# Altium PCB auto-on-relay.PcbDoc
Units mil, origin at the board's own origin, x right, y up, seen from the top; angles counter-clockwise.
Board outline 5120 x 3350 mil, 2 copper layers (Top Layer, Bottom Layer); 68 components, 73 nets, 308 pads, 0 vias.
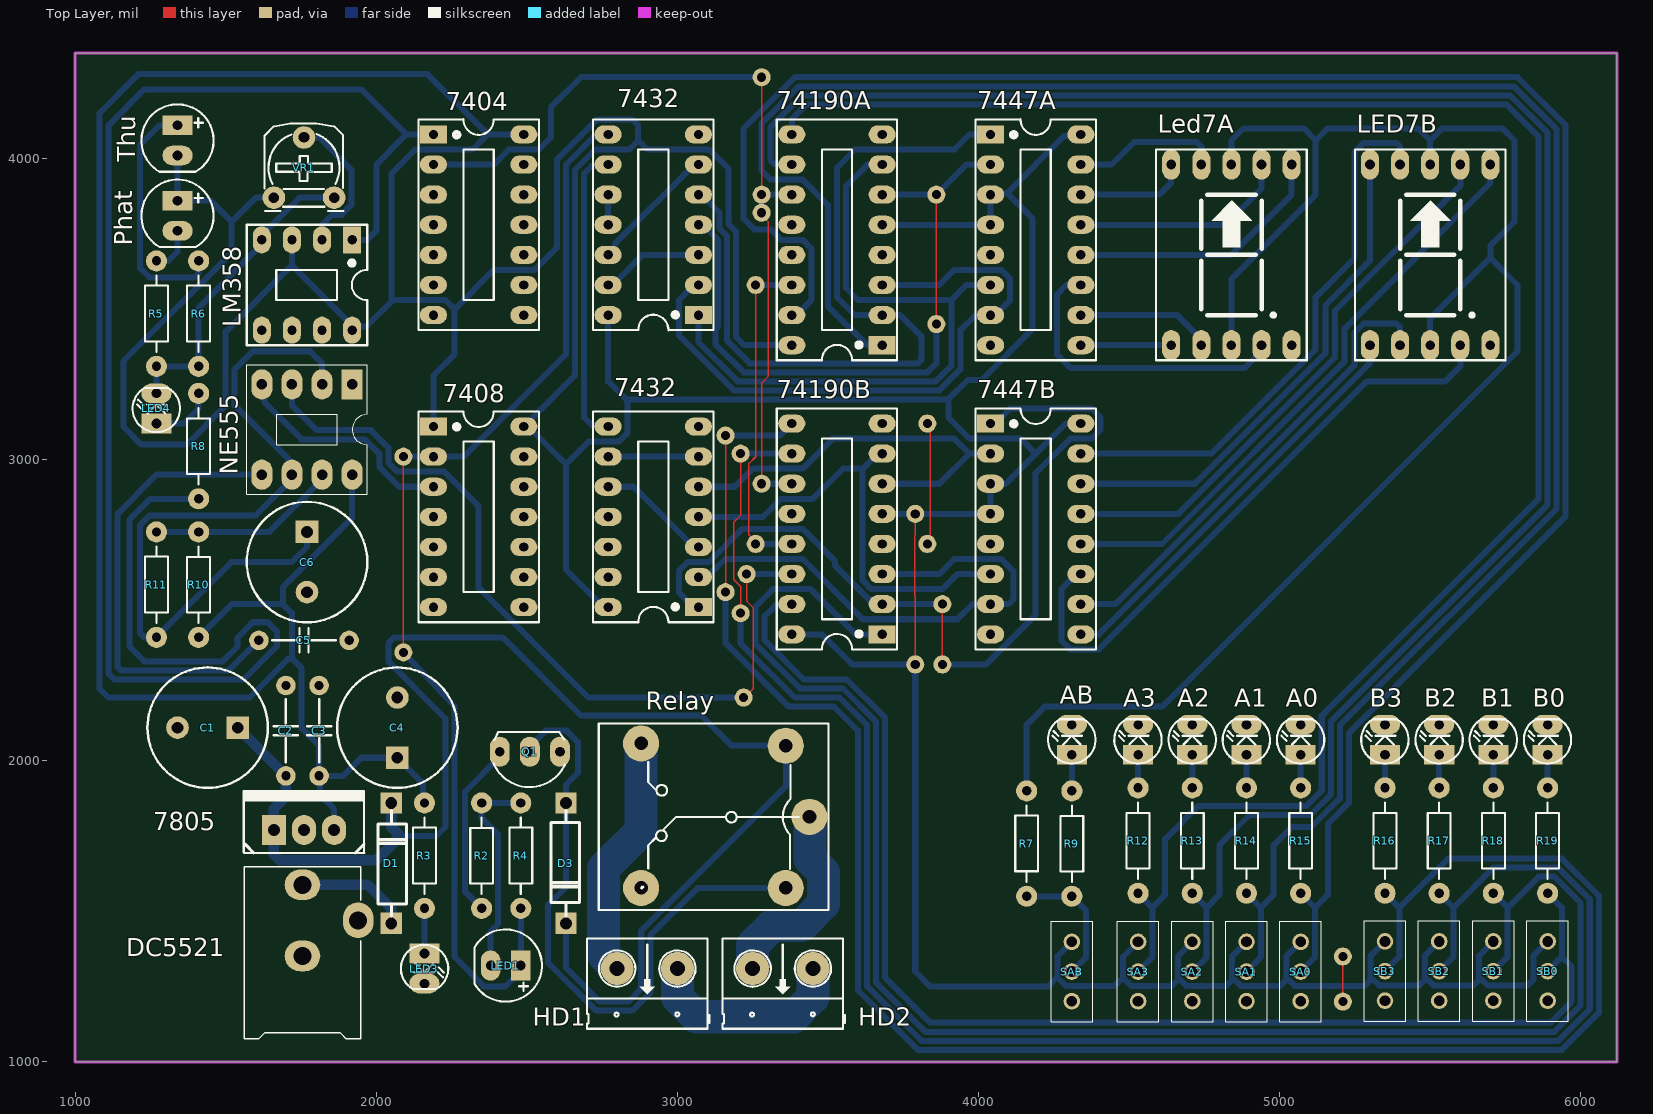
[diagram p0: Top Layer view]
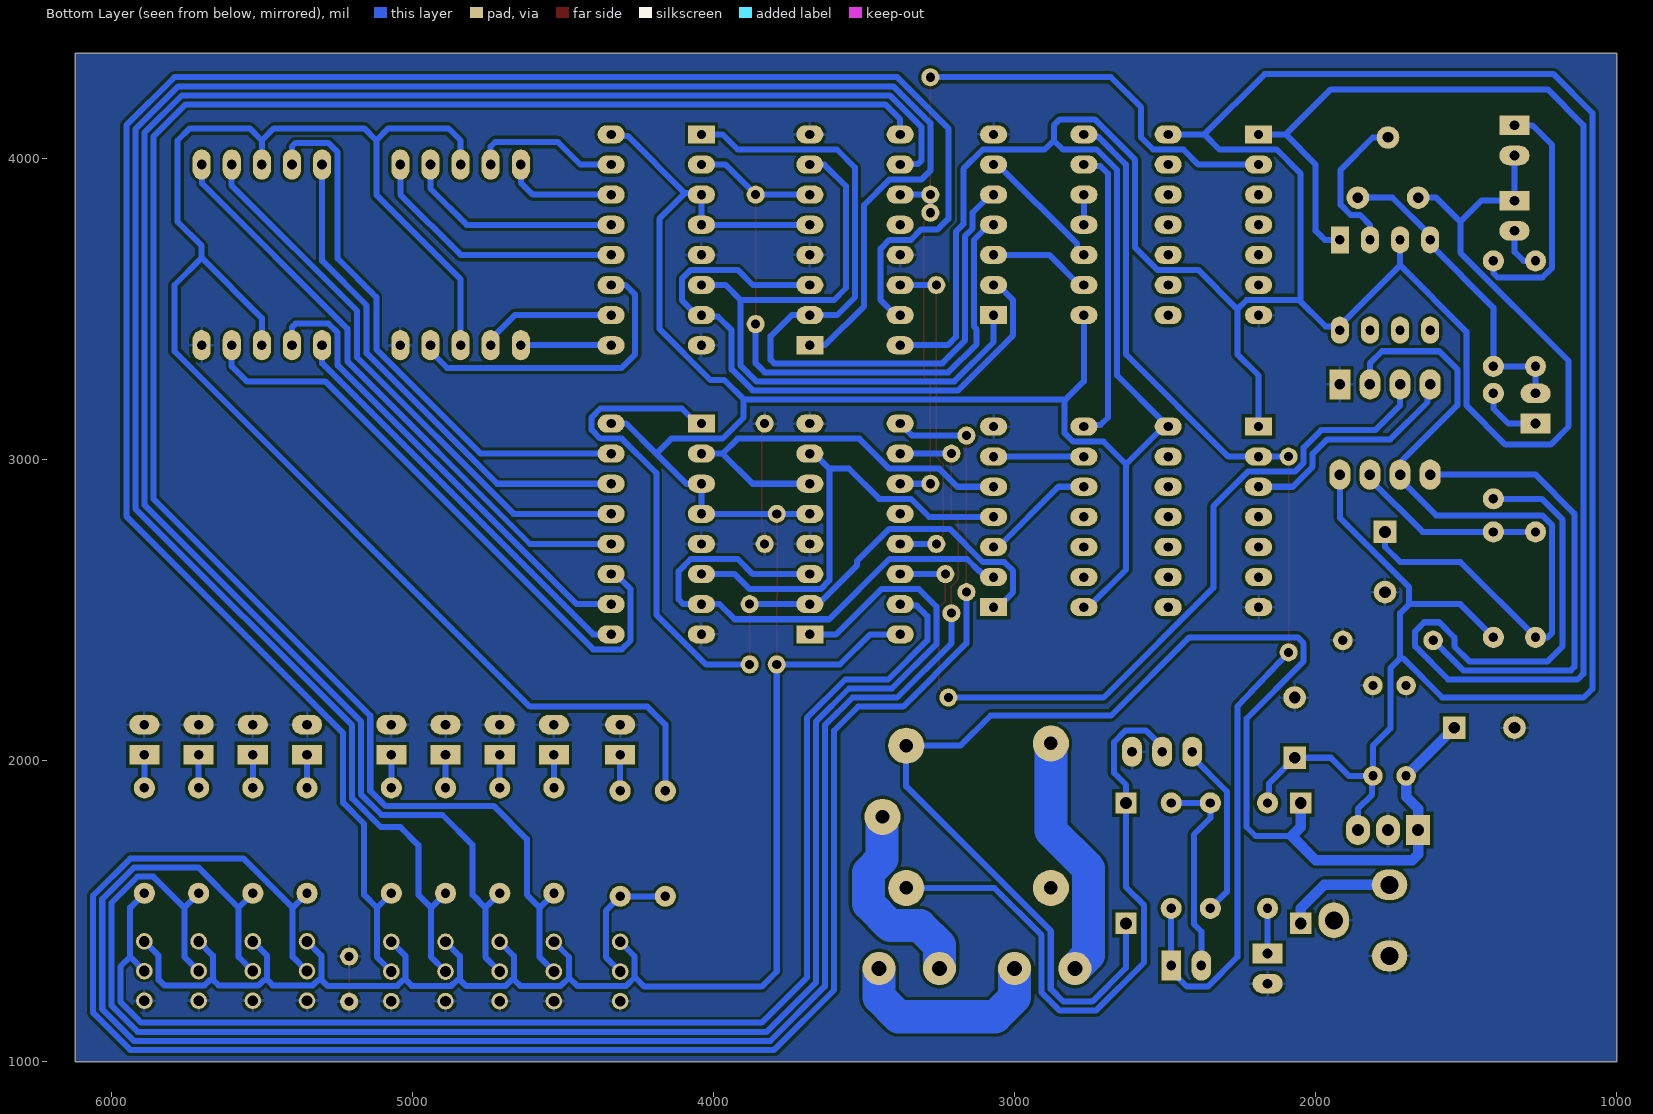
[diagram p1: Bottom Layer view, seen from below]
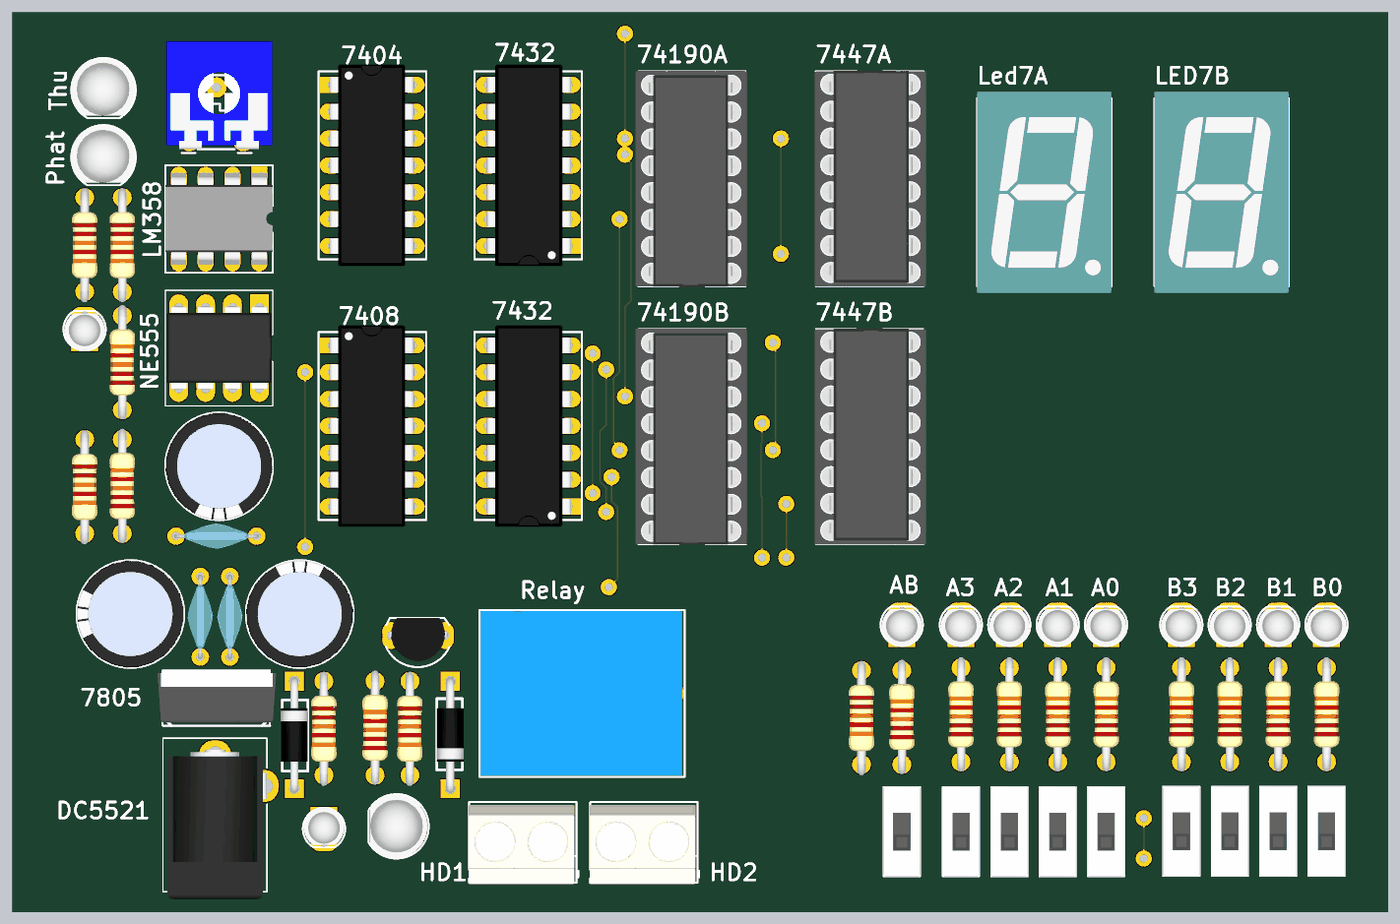
[diagram p2: 3D render of the assembled board from above, using the file's embedded part models]

## Layer stack, top to bottom
Top Solder: solder mask 0.4, Solder Resist, Dk 3.5
Top Layer: signal copper 1.4
Dielectric 1: dielectric 12.6, FR-4, Dk 4.8
Bottom Layer: signal copper 1.4
Bottom Solder: solder mask 0.4, Solder Resist, Dk 3.5

## Board outline
1000,1000 1000,4350 6120,4350 6120,1000

## Design rules (kind name [scope] priority, off if disabled: settings)
Clearance [All] p1: gap=10 ignorepadtopadclearanceinfootprint=FALSE
PolygonConnect [All] p1: connectstyle=Relief reliefconductorwidth=10 reliefentries=4 polygonreliefangle="90 Angle" airgapwidth=10
RoutingVias [All] p1: holewidth=28 width=50 viastyle="Through Hole" minholewidth=28 minwidth=50 maxholewidth=28 maxwidth=50
SilkToSilkClearance [All] p1: silktosilkclearance=5
SilkToSolderMaskClearance [IsText] p1: minsilkscreentomaskgap=10 clearancetoexposedcopper=TRUE
SolderMaskExpansion [All] p1: expansion=4 istentingtop=FALSE
Width [All] p1: maxlimit=150 minlimit=1 preferedwidth=35
28 further rules are at their usual default settings.

## Components (designator, comment, footprint, x,y, rotation, side; value= is the part's Value field where it differs from the comment)
7404 "7404" DIP14/W0.3 2190,4080 r270 top
7408 "7408" DIP14/W0.3 2190,3110 r270 top (schematic designator IC7)
7432 "7432" DIP14/W0.3 3070,2510 r90 top (schematic designator IC5)
7432 "7432" DIP14/W0.3 3070,3480 r90 top (schematic designator IC4)
7447A "7447" DIP16/W0.3 4040,4080 r270 top value="7447 , 74247"
7447B "7447" DIP16/W0.3 4040,3120 r270 top value="7447 , 74247"
7805 "LM7805" QTO-220 1660,1770 r0 top
74190A "74190" DIP16/W0.3 3680,3380 r90 top
74190B "74190" DIP16/W0.3 3680,2420 r90 top
A0 "LED" LED-3 5070,2020 r90 top value="LED 3 ly Single Colour"
A1 "LED" LED-3 4890,2020 r90 top value="LED 3 ly Single Colour"
A2 "LED" LED-3 4710,2020 r90 top value="LED 3 ly Single Colour"
A3 "LED" LED-3 4530,2020 r90 top value="LED 3 ly Single Colour"
AB "LED" LED-3 4310,2020 r90 top value="LED 3 ly Single Colour" (schematic designator LED5)
B0 "LED" LED-3 5890,2020 r90 top value="LED 3 ly Single Colour"
B1 "LED" LED-3 5710,2020 r90 top value="LED 3 ly Single Colour"
B2 "LED" LED-3 5530,2020 r90 top value="LED 3 ly Single Colour"
B3 "LED" LED-3 5350,2020 r90 top value="LED 3 ly Single Colour"
C1 "1000uF" CYL/D.400/LS.200 1440,2110 r180 top
C2 "104" "CAP Ceramic/W300" 1700,1950 r90 top
C3 "104" "CAP Ceramic/W300" 1810,1950 r90 top
C4 "1000uF" CYL/D.400/LS.200 2070,2110 r90 top
C5 "10nF" "CAP Ceramic/W300" 1610,2400 r0 top
C6 "47uF" CYL/D.400/LS.200 1770,2660 r270 top
D1 "Diode Power" DIODE/POW/1A 2050,1460 r90 top
D3 "Diode Power" DIODE/POW/1A 2630,1860 r270 top
DC5521 "CONN_PWR_JACK_2.1x5.5mm" CONN_PWR_JACK_2.1x5.5mm 1754.96,1048.74 r180 top value="2.1mm ID, 5.5mm OD"
HD1 "Header 2" HED2 3000,1310 r180 top
HD2 "Header 2" HED2 3450,1310 r180 top
LED1 "LED" LED-5-RED 2480,1320 r180 top value="LED 3 ly Single Colour"
LED3 "LED" LED-3 2160,1360 r270 top value="LED 3 ly Single Colour"
LED4 "LED" LED-3 1270,3120 r90 top value="LED 3 ly Single Colour"
Led7A "7SEG S" 7SEGS 4640,3380 r0 top value="LED 7S SEG"
LED7B "7SEG S" 7SEGS 5300,3380 r0 top value="LED 7S SEG"
LM358 "LM358" DIP8/W0.3 1920,3730 r180 top
NE555 "TLC555" "DIP 8" 1920,3250 r180 top
Phat "Photo Diode" LED-5-GREEN 1340,3860 r270 top
Q1 "C1815" QTO-92 2510,2030 r180 top
R2 "10k" R1/4W 2350,1860 r270 top
R3 "150" R1/4W 2160,1510 r90 top
R4 "10k" R1/4W 2480,1510 r90 top
R5 "150" R1/4W 1270,3310 r90 top
R6 "10k" R1/4W 1410,3310 r90 top
R7 "75" R1/4W 4160,1550 r90 top
R8 "180" R1/4W 1410,3220 r270 top
R9 "150" R1/4W 4310,1900 r270 top
R10 "10k" R1/4W 1410,2760 r270 top
R11 "10k" R1/4W 1270,2410 r90 top
R12 "150" R1/4W 4530,1910 r270 top
R13 "150" R1/4W 4710,1910 r270 top
R14 "150" R1/4W 4890,1910 r270 top
R15 "150" R1/4W 5070,1910 r270 top
R16 "150" R1/4W 5350,1910 r270 top
R17 "150" R1/4W 5530,1910 r270 top
R18 "150" R1/4W 5710,1910 r270 top
R19 "150" R1/4W 5890,1910 r270 top
Relay "Relay 10A/12V" RL_SPDT_10A 3438.74,1813.78 r180 top value="Relay SPDT, 10A, 12V"
SA0 "SS12D00G3" SS12D00G3 5070,1300 r90 top
SA1 "SS12D00G3" SS12D00G3 4890,1300 r90 top
SA2 "SS12D00G3" SS12D00G3 4710,1300 r90 top
SA3 "SS12D00G3" SS12D00G3 4530,1300 r90 top
SAB "SS12D00G3" SS12D00G3 4310,1300 r90 top
SB0 "SS12D00G3" SS12D00G3 5890,1301.57 r90 top
SB1 "SS12D00G3" SS12D00G3 5710,1301.57 r90 top
SB2 "SS12D00G3" SS12D00G3 5530,1301.57 r90 top
SB3 "SS12D00G3" SS12D00G3 5350,1301.57 r90 top
Thu "Photo Diode" LED-5-GREEN 1340,4110 r270 top
VR1 "10K" VR 1660,3870 r0 top

## Footprints (in the part's own frame and the unit in brackets; to place one, negate y for a bottom-side part, rotate by r counter-clockwise, add the part's x,y. Pads: shape width x height; smd on the part's side, far side on the other; paste and mask are expansions set on the pad)
7SEGS [mil] "DIP 10 Leads; Body 12 x 15 mm; Pitch 0.5 mm"
  oval 60x100 hole 32: 1(0,0) 2(100,0) 3(200,0) 4(300,0) 5(400,0) 6(400,600) 7(300,600) 8(200,600) 9(100,600) 10(0,600)
  silkscreen extent -50,-50 450,650, body extent -50,-75 450,675, height 316
"CAP Ceramic/W300" [mil]
  round 65 hole 31: 1(0,0) 2(300,0)
  silkscreen extent 45,-40 255,40, body extent -8,-47 307,47, height 340
CONN_PWR_JACK_2.1x5.5mm [mm] "Power Connector, 2.1mm ID, 5.5mm OD"
  oval 3x2.6 hole 1.511: 1(0,-13.7) 2(0,-7.7)
  oval 2.6x3 hole 1.511: 3(-4.7,-10.7)
  silkscreen extent -4.9,-15.22 4.92,-0.7, body extent -4.9,-14.1 4.5,0, height 11
CYL/D.400/LS.200 [mil]
  rect 75x75 hole 39: 1(-100,0)
  round 75 hole 39: 2(100,0)
  silkscreen extent -200,-200 200,200, body extent -198,-199 200,199, height 500
DIODE/POW/1A [mm]
  rect 1.8x1.8 hole 1: 1(0,0) 2(10.16,0)
  silkscreen extent 0.64,-1.27 9.53,1.14, body extent -0.38,-1.28 10.54,1.28, height 2.55
DIP8/W0.3 [mil] "8 PIN, W 300mil, Pin to pin 100mil"
  rect 60x90 hole 31: 1(0,0)
  oval 60x90 hole 31: 2(100,0) 3(200,0) 4(300,0) 5(300,300) 6(200,300) 7(100,300) 8(0,300)
  silkscreen extent -50,-50 350,350, body extent -50,-40 350,336, height 201
DIP14/W0.3 [mil] "14PIN, W 300mil, Pin to pin 100mil"
  rect 60x90 hole 31: 1(0,0)
  oval 60x90 hole 31: 2(100,0) 3(200,0) 4(300,0) 5(400,0) 6(500,0) 7(600,0) 8(600,300) 9(500,300) 10(400,300) 11(300,300) 12(200,300) 13(100,300) 14(0,300)
  silkscreen extent -50,-50 650,350, body extent -75,-10 675,305, height 159
DIP16/W0.3 [mil] "16 PIN, W 300mil, Pin to pin 100mil"
  rect 60x90 hole 31: 1(0,0)
  oval 60x90 hole 31: 2(100,0) 3(200,0) 4(300,0) 5(400,0) 6(500,0) 7(600,0) 8(700,0) 9(700,300) 10(600,300) 11(500,300) 12(400,300) 13(300,300) 14(200,300) 15(100,300) 16(0,300)
  silkscreen extent -50,-50 750,350, body extent -52,-53 752,360, height 317
"DIP 8" [mil]
  rect 70x100 hole 35: 1(0,0)
  oval 70x100 hole 35: 2(100,0) 3(200,0) 4(300,0) 5(300,300) 6(200,300) 7(100,300) 8(0,300)
  silkscreen extent -50,-65 350,365, body extent -45,-4 345,304, height 190
HED2 [mil] "Header 2, 2 pin, hight 300mil, Pin to Pin 200, Colour Green"
  round 110 hole 50: 1(0,0) 2(200,0)
  silkscreen extent -106,-100 300,200, body extent -92,-90 302,205, height 394
LED-3 [mil] "LED 2 PIN, 3ly Only colour"
  rect 65x100 hole 32: 1(0,0)
  oval 65x100 hole 32: 2(100,0)
  silkscreen extent -29,-78 118,79, body extent -29,-75 109,75, height 256
LED-5-GREEN [mil] "LED 2 PIN, 5 ly , Only colour,pin to pin 100mil"
  rect 65x100 hole 32: 1(0,0)
  oval 65x100 hole 32: 2(100,0)
  silkscreen extent -70,-120 154,120, body extent -69,-120 145,117, height 339
LED-5-RED [mil] "LED 2 PIN, 5 ly , Only colour,pin to pin 100mil"
  rect 65x100 hole 32: 1(0,0)
  oval 65x100 hole 32: 2(100,0)
  silkscreen extent -70,-120 154,120, body extent -65,-119 149,118, height 339
QTO-92 [mil] "TO-92"
  oval 66x100 hole 32: 1(-100,0) 2(0,0) 3(100,0)
  silkscreen extent -117,-65 120,118, body extent -109,-66 109,95, height 245
QTO-220 [mil] "TO-220 - 1-2-3"
  rect 80x100 hole 39: 1(0,0)
  oval 80x100 hole 39: 2(100,0) 3(200,0)
  silkscreen extent -100,-76 300,130, body extent -119,-64 322,121, height 905
R1/4W [mil] "R 1/4W, 2 Pin, 350mil"
  round 70 hole 31: 1(0,0) 2(350,0)
  silkscreen extent 48,-38 302,38, body extent -40,-47 386,47, height 111
RL_SPDT_10A [mil] "Relay SPDT, 5 pin, 10A,W 650mil, L 800mil, H 800mil"
  round 120 hole 45: 1(0,0) 2(559.06,236.22) 3(559.06,-243.78) 4(78.74,-236.22) 5(78.74,236.22)
  silkscreen extent -63,-311 700,310, body extent -55,-306 697,304, height 602
SS12D00G3 [mm]
  round 1.4 hole 0.9: 1(-2.5,0) 2(0,0) 3(2.5,0)
  silkscreen extent -4.25,-1.75 4.25,1.75, body extent -4.25,-1.75 4.25,1.75, height 6.7
VR [mil] "Resistor Variable"
  round 75 hole 35: 1(0,0) 2(100,200) 3(200,0)
  silkscreen extent -31,-44 231,246, body extent -87,-30 307,372, height 165

## Part data
7404: "Hex Inverter", Code_IPC=SOIC127P600-14, ComponentLink1Description="Manufacturer Link", ComponentLink1URL=http://www.national.com/, ComponentLink2Description=Datasheet, ComponentLink2URL=http://www.fairchildsemi.com/ds/74/74F04.pdf
7408: "Quad 2-Input AND Gate"
7432 7432: "Quad 2-Input OR Gate"
7447A 7447B: "BCD to 7-Segment Decoder/Driver"
7805: library part LM78xx, "On ap +, from + 5 to + 24VDC"
74190A 74190B: "Synchronous 4-Bit Up/Down Counter with Mode Control", Copyright by=VanDungEvn@Gmail.com
A0 A1 A2 A3 AB B0 B1 B2 B3 LED1 LED3 LED4: "LED Single colour Green and Red"
C1 C4 C6: library part Capacitor, "Capacitor pol"
C2 C3 C5: library part "Capacitor NP", "Capacitor non-pol"
D1 D3: PackageDocument=Aug-1999, ComponentLink1Description="Manufacturer Link", ComponentLink1URL=http://www.fairchildsemi.com/, ComponentLink2Description=Datasheet, ComponentLink2URL=http://www.fairchildsemi.com/ds/1N%2F1N5400.pdf, DatasheetDocument=1998, LatestRevisionDate=17-Jul-2002, LatestRevisionNote="Re-released for DXP Platform.", PackageReference=DO-201AD, Published=8-Jun-2000, Publisher="Altium Limited"
DC5521: "Power Connector, THT, 2.1mm ID, 5.5mm OD", Manufacturer 1="CUI Inc", Manufacturer Part Number 1=PJ-102AH, Package / Case="PCB mount", Supplier Part Number 1=CP-102AH-ND, Category=Connectors, Mounting Type="Through Hole", SCDType=undef, Supplier 1=Digi-Key
HD1 HD2: "Header 2 (Green)"
Led7A LED7B: library part "LED 7S", "Single 7 Seg Dipslay"
LM358: "Low-Power Dual Operational Amplifier"
NE555: "TLC555 LinCMOS™ Timer"
Phat Thu: "Photosensitive Diode"
Q1: "NPN 600mW, ECB"
R2 R3 R4 R5 R6 R7 R8 R9 R10 R11 R12 R13 R14 R15 R16 R17 R18 R19: library part Res, "Res"
Relay: library part "Relay 1", "Relay SPDT,10A - 12VDC 5 Pin"
SA0 SA1 SA2 SA3 SAB SB0 SB1 SB2 SB3: "Switch", Manufacturer_Name=Vimex, Datasheet Link=http://vimex.com/switches/techdocs/SS12D00-tech.pdf, Height=7mm, Manufacturer_Part_Number=SS12D00G3
VR1: library part VR, "Var Resistor RM065", RM065-103=1K, RM065-104=10K, RM065-503=5K

## Free pads (board coordinates)
  round 60 hole 30: 3(3860,3880) 4(3860,3450.38) 5(3160,2560) 6(3210,2490) 7(3230,2620) 8(3160,3080) 9(3210,3020) 10(3280,2920) 11(3260,3580) 12(3260,2720) 13(3280,3880) 14(3880,2520) 15(3880,2320) 17(3220,2210) 18(2090,3010) 19(2090,2360) 20(3280,3820) 21(3280,4270) 23(3790,2820) 32(3830,3120) 33(3830,2720) 35(3790,2320) 37(5210,1350) 38(5210,1200)

## Nets (pads, with @x,y where several pads share a name; then routed paths per layer and width w, separated by ;. In a path a pad name is that pad's centre, name@x,y a point inside that pad or via, vN(x,y) a via of type N, cw(c..) or ccw(c..) an arc to the next point about the centre after c; other vN are vias at no path point)
5V: 7404.14 7408.1 7408.14 7432.14 7447A.3 7447A.4 7447A.16 7447B.3 7447B.4 7447B.16 7805.3 74190A.5 74190A.16 74190B.5 74190B.16 C3.1 C4.1 LM358.3 LM358.8 NE555.8 pad.23 pad.35 Phat.1 R3.2 R10.2 SA0.3 SA1.3 SA2.3 SA3.3 SAB.3 SB0.3 SB1.3 SB2.3 SB3.3 Thu.2 VR1.1 | length 24904.2
  Top Layer w5: pad.35 3790,2545.08 3787.5,2547.58 3787.5,2747.24 3790,2749.74 pad.23
  Bottom Layer w20: Thu.2 Phat.1 1450,3860 1520,3790 ; R10.2 1520,2520 1690,2520 ; VR1.1 1600,3870 1520,3790 ; LM358.3 1720,3645 ; 7805.3 1860,1840 1812.5,1887.5 1812.5,1947.5 C3.1 ; NE555.8 1920,2806.72 1690,2576.72 1690,2520 ; R3.2 2155,1865 2155,1925 C4.1 1950,2010 1890,1950 C3.1 ; 7408.1 2190,3280 2260,3350 2260,3500 ; 7404.14 2370,4080 ; 7408.14@2499.59,3115.41 2512.65,3128.48 2512.65,3132.65 2660,3280 2660,3962.43 2727.57,4030 2840,4030 2870,4060 ; 7408.14@2505,3110 2630,2985 ; 7432.14@2770,2510 2755,2510 2630,2635 2630,2985 ; 7432.14@2770,3480 2770,3260 2830,3200 ; 74190B.16 3480,2420 3580,2320 pad.35 3790,1300 3840,1250 4230,1250 4260.3,1280.3 4262.44,1280.3 ; 74190A.16 3222.43,3380 3195,3407.43 3195,3757.43 3170,3782.43 3170,3965.71 3105.71,4030 2900,4030 2870,4060 ; 74190B.5 pad.23 7447B.4 7447B.3 4090,2920 4190,3020 ; 74190A.5 7447A.4 7447A.3 4044.93,3884.93 4094.93,3884.93 ; SAB.3 4262.44,1350.87 4262.44,1280.3 ; 7447B.16 4290,3120 4190,3020 ; 7447A.16 4335.07,4075.07 4285.07,4075.07 4094.93,3884.93 ; SA3.3 4480,1348.43 4480,1280 ; SA2.3 4662.44,1350.87 4662.44,1272.44 ; SA1.3 4842.44,1350.87 4842.44,1272.44 ; SA0.3 5022.44,1350.87 5022.44,1272.44 ; SB3.3 5302.44,1352.44 5302.44,1272.44 ; SB2.3 5482.44,1352.44 5482.44,1272.44 ; SB1.3 5662.44,1352.44 5662.44,1272.44 ; SB0.3 5842.44,1352.44 5842.44,1272.44 5824.02,1254.02 5690.3,1254.02 5671.88,1272.44 5662.44,1272.44 ; 1520,3790 1520,3687.57 1160,3327.57 1160,3110 1220,3050 1370,3050 1500,3180 1500,3425 1720,3645 ; 1690,2520 1720,2490 1720,2340 ; 1720,2340 1710,2340 1580,2210 1110,2210 1081,2239 1081,4151 1210,4280 2170,4280 2370,4080 ; 1720,2340 1752.5,2307.5 1752.5,2107.5 1810,2050 C3.1 ; 1720,3645 1920,3445 LM358.8 1932.43,3442.43 1967.43,3442.43 2055,3530 ; 2055,3530 2230,3530 2260,3500 ; 2055,3530 2050,3535 2050,3950 2130,4030 2320,4030 2370,4080 ; 2260,3500 2390,3630 2525.71,3630 2600,3704.29 2600,3995.71 2734.29,4130 2850,4130 2870,4110 2870,4060 ; 2630,2985 2705,3060 2805.71,3060 2835,3089.29 2835,3195 2830,3200 ; 2830,3200 3900,3200 ; 3900,3200 3900,3140 3970,3070 4140,3070 4190,3020 ; 3900,3200 3964.64,3264.64 4010.36,3264.64 4180,3434.29 4180,3799.85 4094.93,3884.93 ; 4262.44,1280.3 4290.3,1252.44 4452.44,1252.44 4480,1280 ; 4480,1280 4507.56,1252.44 4642.44,1252.44 4662.44,1272.44 ; 4662.44,1272.44 4670.3,1272.44 4690.3,1252.44 4822.44,1252.44 4842.44,1272.44 ; 4842.44,1272.44 4850.3,1272.44 4870.3,1252.44 5002.44,1252.44 5022.44,1272.44 ; 5022.44,1272.44 5030.3,1272.44 5050.3,1252.44 5282.44,1252.44 5302.44,1272.44 ; 5302.44,1272.44 5311.88,1272.44 5330.3,1254.02 5464.02,1254.02 5482.44,1272.44 ; 5482.44,1272.44 5491.88,1272.44 5510.3,1254.02 5644.02,1254.02 5662.44,1272.44
12V-2A: 7805.1 C1.1 C2.1 D1.2 D3.2 Relay.4 | length 4883.3
  Bottom Layer w20: 2080,1750 2200,1750 2230,1780 2230,2140 2040,2330 2040,2390 2060,2410 2420,2410 2680,2150 3080,2150 3180,2050 Relay.4 3360,1915 2880,1435 2880,1242.43 2837.57,1200 2742.43,1200 2630,1312.43 D3.2
  Bottom Layer w35: C1.1 C2.1 1700,1880 1660,1840 7805.1 1660,1690 1680,1670 2000,1670 2080,1750 2050,1780 D1.2
GND: 7404.7 7408.7 7432.7 7447A.5 7447A.8 7447B.5 7447B.8 7805.2 74190A.4 74190A.8 74190A.13 74190B.4 74190B.8 A0.2 A1.2 A2.2 A3.2 AB.2 B0.2 B1.2 B2.2 B3.2 C1.2 C2.2 C3.2 C4.2 C5.2 C6.2 DC5521.2 DC5521.3 LED3.2 Led7A.5 LED7B.5 NE555.1 pad.32 pad.33 pad.37 pad.38 Q1.1 SA0.1 SA1.1 SA2.1 SA3.1 SAB.1 SB0.1 SB1.1 SB2.1 SB3.1 | length 558.3
  Top Layer w5: pad.33 3840,2730 3840,3110 pad.32 ; pad.38 pad.37
IC4_8: 7408.2 7432.8@2770,4080 LED1.1 pad.18 pad.19 R4.1 | length 3711.5
  Top Layer w5: pad.19 pad.18
  Bottom Layer w20: pad.19 2260,2180 2260,1348.25 2358.25,1250 2427.5,1250 2480,1302.5 LED1.1 R4.1 ; pad.18 7408.2 2290,3010 2630,3350 2630,3980 2722.35,4072.35 2762.35,4072.35 7432.8@2770,4080
NE555_3: 74190B.14 NE555.3 pad.7 pad.17 | length 2743.9
  Top Layer w5: pad.17 3230,2218.03 3252.5,2240.53 3252.5,2507.6 3230,2530.1 pad.7
  Bottom Layer w20: NE555.3 1720,3180 1802.28,3097.72 1982.28,3097.72 2040,3040 2040,2989.29 2069.29,2960 2225.71,2960 2340,2845.71 2340,2574.29 2704.29,2210 pad.17 ; pad.7 74190B.14
Net7404_1: 7404.1 LM358.1 R8.2 | length 5402.3
  Bottom Layer w20: R8.2 1250,2870 1180,2800 1180,2380 1230,2330 1490,2330 1539.14,2379.14 1539.14,2409.14 1590,2460 1640,2460 1670,2430 1670,2380 1560,2270 1130,2270 1111,2289 1111,4111 1230,4230 1950,4230 2100,4080 ; LM358.1 1970,3730 2000,3760 2000,3980 2100,4080 ; 7404.1 2100,4080
Net7447A_1: 7432.5@3070,3880 7447A.1 74190A.2 | length 2608.8
  Bottom Layer w20: 7432.5@3070,3880 3080,3880 3140,3820 3140,3767.43 3165,3742.43 3165,3395 3240,3320 3798.28,3320 3810,3331.72 3810,3410 3740,3480 74190A.2 3590,3480 3530,3540 3530,3970 3590,4030 3920,4030 3970,4080 7447A.1
Net7447A_2: 7432.4@3070,3780 7447A.2 74190A.6 pad.3 pad.4 | length 2182.1
  Top Layer w5: pad.4 pad.3
  Bottom Layer w20: 7432.4@3070,3780 3085,3780 3135,3730 3135,3441.72 3126.14,3432.86 3126.14,3383.86 3220,3290 3830,3290 3860,3320 pad.4 ; 74190A.6 pad.3 3960,3980 7447A.2
Net7447A_6: 7432.1@3070,3480 7447A.6 74190A.7 | length 2228.4
  Bottom Layer w20: 7432.1@3070,3480 3070,3390 3200,3260 3857.57,3260 3910,3312.43 3910,3530 ; 74190A.7 3631.72,3980 3560,3908.28 3560,3570 3600,3530 3910,3530 ; 7447A.6 3960,3580 3910,3530
Net7447A_7: 7432.2@3070,3580 7447A.7 74190A.3 | length 2107.7
  Bottom Layer w20: 7432.2@3070,3580 3055,3580 3005,3530 3005,3412.57 3187.57,3230 3870,3230 3940,3300 3940,3430 3985.07,3475.07 4035.07,3475.07 7447A.7 4055,3480 4105,3530 4105,3600.71 4075.71,3630 3919.59,3630 3869.59,3580 74190A.3
Net7447A_9: 7447A.9 Led7A.1 | length 300
  Bottom Layer w20: 7447A.9 Led7A.1
Net7447A_10: 7447A.10 Led7A.2 | length 453.1
  Bottom Layer w20: 7447A.10 4660,3480 4740,3400 Led7A.2
Net7447A_11: 7447A.11 Led7A.4 | length 1032.8
  Bottom Layer w20: 7447A.11 4291.72,3580 4260,3548.28 4260,3350 4305,3305 4885,3305 4940,3360 Led7A.4
Net7447A_12: 7447A.12 Led7A.6 | length 882.8
  Bottom Layer w20: 7447A.12 4840,3680 5040,3880 Led7A.6
Net7447A_13: 7447A.13 Led7A.7 | length 729.7
  Bottom Layer w20: 7447A.13 4820,3780 4940,3900 Led7A.7
Net7447A_14: 7447A.14 Led7A.10 | length 376.6
  Bottom Layer w20: 7447A.14 4600,3880 4640,3920 Led7A.10
Net7447A_15: 7447A.15 Led7A.9 | length 497.3
  Bottom Layer w20: 7447A.15 4441.74,3980 4516.74,4055 4725,4055 4740,4040 Led7A.9
Net7447B_1: 7432.1@3070,2510 7447B.1 74190B.2 pad.14 pad.15 | length 2964
  Top Layer w5: pad.15 pad.14
  Bottom Layer w20: 7432.1@3070,2510 3055,2510 3005,2560 3005,2630.71 3034.29,2660 3105.71,2660 3215.71,2770 3415.71,2770 3523.79,2661.92 3523.79,2648.08 3644.21,2527.65 3672.35,2527.65 74190B.2 pad.14 ; pad.15 4025.71,2320 4190,2484.29 4190,2955.71 4304.29,3070 4375.71,3070 4405,3099.29 4405,3140.71 4375.71,3170 4105,3170 4055,3120 7447B.1
Net7447B_2: 7432.5@3070,2910 7447B.2 74190B.6 | length 1388.4
  Bottom Layer w20: 7432.5@3070,2910 3190,2910 3250,2970 3415.71,2970 3515.71,3070 3920,3070 3970,3020 ; 74190B.6 3870,2920 3970,3020 ; 7447B.2 3970,3020
Net7447B_6: 7432.4@3070,2810 7447B.6 74190B.7 | length 1525.5
  Bottom Layer w20: 7432.4@3070,2810 3284.29,2810 3344.29,2870 3450,2870 3550,2970 3615,2970 ; 74190B.7 3665,3020 3615,2970 ; 7447B.6 3930,2620 3880,2570 3644.29,2570 3615,2599.29 3615,2970
Net7447B_7: 7432.2@3070,2610 7447B.7 74190B.3 | length 1747.9
  Bottom Layer w20: 7432.2@3070,2610 3095.82,2610 3115.82,2630 3118.14,2630 3158.14,2670 3415.71,2670 3615.71,2470 3930,2470 3980,2520 4100,2520 4115.71,2535.71 4115.71,2630 4075.71,2670 3919.59,2670 3869.59,2620 74190B.3
Net7447B_9: 7447B.9 LED7B.1 | length 1392.8
  Bottom Layer w20: 7447B.9 4400,2420 5300,3320 LED7B.1
Net7447B_10: 7447B.10 LED7B.2 | length 1574.4
  Bottom Layer w20: 7447B.10 4454.75,2520 5248,3313.25 5248,3421.54 5278.46,3452 5388,3452 5400,3440 LED7B.2
Net7447B_11: 7447B.11 LED7B.4 | length 2052.9
  Bottom Layer w20: 7447B.11 4325,2620 4275,2570 4275,2399.29 4304.29,2370 4400,2370 5290,3260 5550,3260 5600,3310 LED7B.4
Net7447B_12: 7447B.12 LED7B.6 | length 1981.1
  Bottom Layer w20: 7447B.12 4609.3,2720 5216,3326.7 5216,3434.79 5698.18,3916.97 5698.18,3978.18 LED7B.6
Net7447B_13: 7447B.13 LED7B.7 | length 1871.7
  Bottom Layer w20: 7447B.13 4664.05,2820 5184,3339.95 5184,3494 5600,3910 LED7B.7
Net7447B_14: 7447B.14 LED7B.10 | length 1679.5
  Bottom Layer w20: 7447B.14 4718.79,2920 5152,3353.21 5152,3512 5300,3660 LED7B.10
Net7447B_15: 7447B.15 LED7B.9 | length 1861.5
  Bottom Layer w20: 7447B.15 4773.54,3020 5120,3366.46 5120,3540 5248,3668 5248,4021.54 5278.8,4052.34 5387.66,4052.34 5400,4040 LED7B.9
Net74190A_1: 74190A.1 R14.2 SA1.2 | length 7073.6
  Bottom Layer w20: 74190A.1 3630,3380 3500,3510 3500,3845.71 3415.71,3930 3310,3930 3280,3960 3280,4117.57 3402.43,4240 5777.57,4240 5920,4097.57 5920,2837.57 5200,2117.57 5200,1875.15 5104.85,1780 5040,1780 4980,1720 4980,1554.88 4937.56,1512.44 ; SA1.2 4937.56,1347.56 4937.56,1512.44 ; R14.2 4937.56,1512.44
Net74190A_9: 74190A.9 R12.2 SA3.2 | length 6196.9
  Bottom Layer w20: 74190A.9 3380,4130 3430,4180 5752.72,4180 5860,4072.72 5860,2870 5140,2150 5140,1900 5090,1850 4730,1850 4620,1740 4620,1554.88 4577.56,1512.44 ; SA3.2 4577.56,1347.56 4577.56,1512.44 ; R12.2 4577.56,1512.44
Net74190A_10: 74190A.10 R13.2 SA2.2 | length 6322.3
  Bottom Layer w20: 74190A.10 3378.43,3981.57 3321.72,3981.57 3310,3993.28 3310,4105.15 3414.85,4210 5765.15,4210 5890,4085.15 5890,2850 5170,2130 5170,1887.57 5102.43,1820 4900,1820 4800,1720 4800,1554.88 4757.56,1512.44 ; SA2.2 4757.56,1347.56 4757.56,1512.44 ; R13.2 4757.56,1512.44
Net74190A_14: 74190A.14 74190B.13 pad.11 pad.12 | length 1118.6
  Top Layer w5: pad.12 3260,2728.03 3237.5,2750.53 3237.5,2987.4 3260,3009.9 pad.11
  Bottom Layer w20: pad.12 74190B.13 ; pad.11 74190A.14
Net74190A_15: 74190A.15 R15.2 SA0.2 | length 6931
  Bottom Layer w20: 74190A.15 3395,3480 3445,3530 3445,3700.71 3415.71,3730 3344.29,3730 3309.64,3764.64 3255.36,3764.64 3220,3800 3220,4100 3390,4270 5790,4270 5950,4110 5950,2811.75 5230,2091.75 5230,1860 5160,1790 5160,1554.88 5117.56,1512.44 ; SA0.2 5117.56,1347.56 5117.56,1512.44 ; R15.2 5117.56,1512.44
Net74190B_1: 74190B.1 R18.2 SB1.2 | length 5407.2
  Bottom Layer w20: 74190B.1 3592.43,2420 3442.43,2570 3317.57,2570 3260,2512.43 3260,2387.57 3407.57,2240 3550,2240 3660,2130 3660,1263.31 3823.31,1100 5912.43,1100 6000,1187.57 6000,1527.78 5912.78,1615 5860.12,1615 5757.56,1512.44 ; SB1.2 5757.56,1349.13 5757.56,1512.44 ; R18.2 5757.56,1512.44
Net74190B_9: 74190B.9 pad.5 pad.8 R16.2 SB3.2 | length 6409.5
  Top Layer w5: pad.5 pad.8
  Bottom Layer w20: pad.5 3160,2390 3370,2180 3520,2180 3600,2100 3600,1238.45 3798.45,1040 5937.28,1040 6060,1162.72 6060,1552.63 5937.63,1675 5560.12,1675 5397.56,1512.44 ; pad.8 3340,3080 74190B.9 ; SB3.2 5397.56,1349.13 5397.56,1512.44 ; R16.2 5397.56,1512.44
Net74190B_10: 74190B.10 pad.6 pad.9 R17.2 SB2.2 | length 5965.6
  Top Layer w5: pad.6 3210,2579.9 3187.5,2602.4 3187.5,2792.51 3210,2815.01 pad.9
  Top Layer w20: 74190B.10 74190B.10@3395,3020
  Bottom Layer w20: pad.6 3209.29,2390.71 3390,2210 3537.57,2210 3630,2117.57 3630,1250.88 3810.88,1070 5924.85,1070 6030,1175.15 6030,1540.21 5925.21,1645 5710.12,1645 5577.56,1512.44 ; pad.9 74190B.10 ; SB2.2 5577.56,1349.13 5577.56,1512.44 ; R17.2 5577.56,1512.44
Net74190B_15: 74190B.15 R19.2 SB0.2 | length 4387.2
  Bottom Layer w20: 74190B.15 3375,2515 3325,2515 3290,2480 3290,2400 3420,2270 3562.43,2270 3690,2142.43 3690,1280 3840,1130 5900,1130 5970,1200 5970,1316.69 5937.56,1349.13 ; SB0.2 5937.56,1349.13 ; R19.2 5937.56,1512.44 5937.56,1349.13
NetA0_1: A0.1 R15.1 | length 110
  Bottom Layer w20: R15.1 A0.1
NetA1_1: A1.1 R14.1 | length 110
  Bottom Layer w20: R14.1 A1.1
NetA2_1: A2.1 R13.1 | length 110
  Bottom Layer w20: R13.1 A2.1
NetA3_1: A3.1 R12.1 | length 110
  Bottom Layer w20: R12.1 A3.1
NetB0_1: B0.1 R19.1 | length 110
  Bottom Layer w20: R19.1 B0.1
NetB1_1: B1.1 R18.1 | length 110
  Bottom Layer w20: R18.1 B1.1
NetB2_1: B2.1 R17.1 | length 110
  Bottom Layer w20: R17.1 B2.1
NetB3_1: B3.1 R16.1 | length 110
  Bottom Layer w20: R16.1 B3.1
NetC5_1: C5.1 NE555.5 | length 1557
  Bottom Layer w20: C5.1 1510,2300 1152.72,2300 1141,2311.72 1141,2821 1270,2950 NE555.5
NetC6_1: C6.1 NE555.2 NE555.6 R11.1 | length 2506.4
  Bottom Layer w20: C6.1 1770,2710 1720,2660 1520,2660 R11.1 1230,2410 1215,2425 1215,2782.78 1247.22,2815 1600,2815 1720,2935 NE555.6 1710.43,2959.57 1710.43,2999.57 1530,3180 1530,3300 1590,3360 1780,3360 1820,3320 NE555.2
NetD1_1: D1.1 DC5521.1 | length 377.4
  Bottom Layer w35: DC5521.1 1971.89,1588.11 2050,1510 D1.1
NetD3_1: D3.1 Q1.2 Relay.5 | length 2124.5
  Bottom Layer w20: Q1.2 2510,2047 2563,2100 2631.95,2100 2670,2061.95 2670,1960 2630,1920 D3.1 2630,1580 2570,1520 2570,1330 2730,1170 2850,1170 2910,1230 2910,1420 3067.56,1577.56 Relay.5
NetHD1_1: HD1.1 HD2.1 | length 694.5
  Bottom Layer w110: HD1.1 3000,1214.44 3064.44,1150 3385.56,1150 3450,1214.44 HD2.1
NetHD1_2: HD1.2 Relay.3 | length 818.1
  Bottom Layer w110: HD1.2 2754.68,1355.32 2754.68,1642.58 2879.68,1767.58 Relay.3
NetHD2_2: HD2.2 Relay.1 | length 677.8
  Bottom Layer w110: HD2.2 3250,1388.12 3314.44,1452.56 3412.56,1452.56 3485,1525 3485,1629.34 3440.65,1673.68 3440.65,1811.87 Relay.1
NetIC4_3: 7432.3@3070,3680 7432.13@2770,3580 | length 341.4
  Bottom Layer w20: 7432.13@2770,3580 2785,3580 2885,3680 7432.3@3070,3680
NetIC4_6: 7432.6@3070,3980 7432.12@2770,3680 | length 435.1
  Bottom Layer w20: 7432.12@2770,3680 2774.18,3680 2792.65,3698.48 2792.65,3716.94 3055.71,3980 7432.6@3070,3980
NetIC4_9: 7432.8@2770,3110 7432.9@2770,3980 | length 994.9
  Bottom Layer w20: 7432.8@2770,3110 2765.07,3114.93 2715.07,3114.93 2690,3140 2690,3950 2715.07,3975.07 2765.07,3975.07 7432.9@2770,3980
NetIC4_10: 7432.10@2770,3880 7432.11@2770,3780 | length 100
  Bottom Layer w20: 7432.11@2770,3780 7432.10@2770,3880
NetIC5_3: 7432.3@3070,2710 7432.10@2770,2910 | length 382.8
  Bottom Layer w20: 7432.10@2770,2910 2855,2910 3055,2710 7432.3@3070,2710
NetIC5_6: 7432.6@3070,3010 7432.9@2770,3010 | length 300
  Bottom Layer w20: 7432.9@2770,3010 7432.6@3070,3010
NetIC7_3: 7408.3 NE555.4 | length 765.4
  Bottom Layer w20: NE555.4 1628.46,3241.54 1628.46,3191.54 1752.28,3067.72 1962.28,3067.72 2010,3020 2010,2976.86 2076.86,2910 7408.3
NetLED1_2: LED1.2 R2.1 R4.2 | length 703.1
  Bottom Layer w20: LED1.2 2380,1433.03 2405,1458.03 2405,1755 2350,1810 R2.1 R4.2
NetLED3_1: LED3.1 R3.1 | length 150
  Bottom Layer w20: LED3.1 R3.1
NetLED4_1: LED4.1 R8.1 | length 210.7
  Bottom Layer w20: LED4.1 1360,3120 1410,3170 R8.1
NetLED4_2: LED4.2 LM358.4 R5.1 R6.1 VR1.3 | length 1043.8
  Bottom Layer w20: LED4.2 R5.1 R6.1 1410,3505 1620,3715 LM358.4 1620,3745 1745,3870 VR1.3
NetLED5_1: AB.1 R9.1 | length 120
  Bottom Layer w20: R9.1 AB.1
NetLed7A_3: Led7A.3 Led7A.8 LED7B.3 LED7B.8 R7.2 | length 5502.3
  Bottom Layer w20: R7.2 4160,2120 4220,2180 4610,2180 5790,3360 5790,3580 5700,3670 ; Led7A.3 4840,3599.24 5120,3879.24 5120,4060 ; Led7A.8 4840,4060 4880,4100 5080,4100 5120,4060 ; LED7B.3 5500,3470 5700,3670 ; LED7B.8 5500,4060 ; 5120,4060 5160,4100 5460,4100 5500,4060 ; 5500,4060 5540,4100 5740,4100 5780,4060 5780,3790 5700,3710 5700,3670
NetLM358_2: LM358.2 VR1.2 | length 493.3
  Bottom Layer w20: VR1.2 1810,4070 1917.5,3962.5 1917.5,3846.18 1883.82,3812.5 1852.5,3812.5 1820,3780 LM358.2
NetNE555_7: NE555.7 R10.1 R11.2 | length 637.5
  Bottom Layer w20: R11.2 R10.1 1645,2760 1820,2935 NE555.7
NetPhat_2: Phat.2 R5.2 | length 152.4
  Bottom Layer w20: R5.2 1310,3660 1340,3690 Phat.2
NetQ1_3: Q1.3 R2.2 | length 590.4
  Bottom Layer w20: R2.2 2295,1565 2295,1898 2410,2013 Q1.3
NetR6_2: R6.2 Thu.1 | length 814.3
  Bottom Layer w20: Thu.1 1280,4110 1215,4045 1215,3637.22 1247.22,3605 1395,3605 1410,3620 R6.2
NetR7_1: R7.1 R9.2 SAB.2 | length 439.4
  Bottom Layer w20: R7.1 R9.2 4357.56,1502.44 4357.56,1347.56 SAB.2
Out-HN: 7404.2 74190A.11 74190B.11 pad.10 pad.13 pad.20 pad.21 | length 2897.3
  Top Layer w5: pad.10 3280,3254.99 3302.5,3277.49 3302.5,3789.47 3280,3811.97 pad.20 pad.13 pad.21
  Bottom Layer w20: 7404.2 2390,3980 2440,4030 2540,4030 2580,4070 2580,4170 2680,4270 pad.21 ; pad.10 74190B.11 ; pad.20 pad.13 74190A.11
VCC: 
pads on no net: 7404.3 7404.4 7404.5 7404.6 7404.8 7404.9 7404.10 7404.11 7404.12 7404.13 7408.4 7408.5 7408.6 7408.8 7408.9 7408.10 7408.11 7408.12 7408.13 7432.11@2770,2810 7432.12@2770,2710 7432.13@2770,2610 74190A.12 74190B.12 LM358.5 LM358.6 LM358.7 Relay.2

## Polygon pours and split planes (outlines as drawn)
GND on Bottom Layer "GND_L02_P000" (solid, remove dead copper, pour order 0): 1000,4350 1000,1000 6120,1000 6120,4350

## Keep-outs
Top Layer:
  the board outline again, w10